# EAGLE board simpleservo3 (EAGLE 4.16)

Size 102.54 x 83.81 mm. Coordinates in mm from the lower left corner, seen from the top.
Outline: 0,0 102.54,0 102.54,83.81 0,83.81 0,0
Copper layers (1*16): Top 0.035mm / dielectric 1.5mm / Bottom 0.035mm
Design rules "default": minimum track width 10mil, minimum drill 24mil, track to track 8mil, track to pad 8mil, pad to pad 8mil, via to via 8mil, smd to smd 8mil, copper to edge 40mil, drill to drill 8mil, minimum pad ring 10mil, minimum via ring 8mil, stop-mask expansion 4mil, vias tented up to drill 0mil, thermal gap 10mil

## Footprints (pad centres in the part's own frame; a part is rotated, then mirrored left to right if it is on the bottom)
0204V = drill 0.813 octagon: 1 -1.27,0; 2 1.27,0
C025-025X050 = drill 0.813 octagon: 1 -1.27,0; 2 1.27,0
E5-13 = drill 1.016 pad 2.54 round: + -2.54,0 | drill 1.016 pad 2.54 octagon: - 2.54,0
E2,5-5 = drill 0.813 pad 1.6 round: + -1.27,0 | drill 0.813 pad 1.6 octagon: - 1.27,0
C025-030X050 = drill 0.813 octagon: 1 -1.27,0; 2 1.27,0
E2,5-6 = drill 0.813 pad 1.6 round: + -1.27,0 | drill 0.813 pad 1.6 octagon: - 1.27,0
DO41-10 = drill 1.118 round: A 5.08,0; C -5.08,0
MOLEX-RJ45 = drill 0.8 round: P$1 -3.81,2.54; P$2 -1.27,2.54; P$3 1.27,2.54; P$4 3.81,2.54; P$5 -2.54,0; P$6 0,0; P$7 2.54,0; P$8 5.08,0 | hole 3.2: -5.08,-6.985; 6.35,-6.985 | hole 1: -6.985,-3.175; 8.255,-3.175
LED3MM = drill 0.813 octagon: A -1.27,0; K 1.27,0
DIL14 = drill 0.813 long: 1 -7.62,-3.81; 2 -5.08,-3.81; 3 -2.54,-3.81; 4 0,-3.81; 5 2.54,-3.81; 6 5.08,-3.81; 7 7.62,-3.81; 8 7.62,3.81; 9 5.08,3.81; 10 2.54,3.81; 11 0,3.81; 12 -2.54,3.81; 13 -5.08,3.81; 14 -7.62,3.81
DIL20 = drill 0.813 long: 1 -11.43,-3.81; 2 -8.89,-3.81; 3 -6.35,-3.81; 4 -3.81,-3.81; 5 -1.27,-3.81; 6 1.27,-3.81; 7 3.81,-3.81; 8 6.35,-3.81; 9 8.89,-3.81; 10 11.43,-3.81; 11 11.43,3.81; 12 8.89,3.81; 13 6.35,3.81; 14 3.81,3.81; 15 1.27,3.81; 16 -1.27,3.81; 17 -3.81,3.81; 18 -6.35,3.81; 19 -8.89,3.81; 20 -11.43,3.81
22-23-2061 = drill 1 long: 1 -6.35,0; 2 -3.81,0; 3 -1.27,0; 4 1.27,0; 5 3.81,0; 6 6.35,0
1X08 = drill 1.016 long: 1 -8.89,0; 2 -6.35,0; 3 -3.81,0; 4 -1.27,0; 5 1.27,0; 6 3.81,0; 7 6.35,0; 8 8.89,0
1X04 = drill 1.016 long: 1 -3.81,0; 2 -1.27,0; 3 1.27,0; 4 3.81,0
1X02 = drill 1.016 long: 1 -1.27,0; 2 1.27,0
W237-132 = drill 1.194 long: 1 -2.54,-0.635; 2 2.54,-0.635
DIL06 = drill 0.813 long: 1 -2.54,-3.81; 2 0,-3.81; 3 2.54,-3.81; 4 2.54,3.81; 5 0,3.81; 6 -2.54,3.81
827001 = drill 1.5 pad 4 round: 1 -7.62,0; 2 -2.54,0; 3 2.54,0; 4 7.62,0 | hole 4: 5.08,-10.16; -5.08,-10.16 | hole 2.5: 10.16,-2.54; -10.16,-2.54
0204/5 = drill 0.813 octagon: 1 -2.54,0; 2 2.54,0
9077-1 = drill 0.813 long: 1 -2.54,-1.016; 2 0,-1.016; 3 2.54,-1.016
2X05 = drill 1.016 octagon: 1 -5.08,-1.27; 2 -5.08,1.27; 3 -2.54,-1.27; 4 -2.54,1.27; 5 0,-1.27; 6 0,1.27; 7 2.54,-1.27; 8 2.54,1.27; 9 5.08,-1.27; 10 5.08,1.27
TO-220-11 = drill 1.016 long: 1 -8.084,-2.718; 2 -6.382,2.337; 3 -4.68,-2.718; 4 -2.978,2.337; 5 -1.276,-2.718; 6 0.425,2.337; 7 2.127,-2.718; 8 3.829,2.337; 9 5.531,-2.718; 10 7.233,2.337; 11 8.934,-2.718
DIL40 = drill 0.813 long: 1 -24.13,-7.62; 2 -21.59,-7.62; 3 -19.05,-7.62; 4 -16.51,-7.62; 5 -13.97,-7.62; 6 -11.43,-7.62; 7 -8.89,-7.62; 8 -6.35,-7.62; 9 -3.81,-7.62; 10 -1.27,-7.62; 11 1.27,-7.62; 12 3.81,-7.62; 13 6.35,-7.62; 14 8.89,-7.62; 15 11.43,-7.62; 16 13.97,-7.62; 17 16.51,-7.62; 18 19.05,-7.62; 19 21.59,-7.62; 20 24.13,-7.62; 21 24.13,7.62; 22 21.59,7.62; 23 19.05,7.62; 24 16.51,7.62; 25 13.97,7.62; 26 11.43,7.62; 27 8.89,7.62; 28 6.35,7.62; 29 3.81,7.62; 30 1.27,7.62; 31 -1.27,7.62; 32 -3.81,7.62; 33 -6.35,7.62; 34 -8.89,7.62; 35 -11.43,7.62; 36 -13.97,7.62; 37 -16.51,7.62; 38 -19.05,7.62; 39 -21.59,7.62; 40 -24.13,7.62
HC49/S = drill 0.813 round: 1 -2.413,0; 2 2.413,0

## Placement (x,y rotation side)
10K  270  [0204V]  32.22,57.78 270 top
C1  0.01u  [C025-025X050]  88.1,50.16 180 top
C2  0.01u  [C025-025X050]  88.1,76.83 180 top
C4  470u  [E5-13]  34.76,75.56 270 top
C5  1u  [E2,5-5]  46.19,75.56 270 top
C8  .1u  [C025-030X050]  19.52,71.75 90 top
C9  10u  [E2,5-6]  19.52,78.1 270 top
C10  10u  [E2,5-6]  71.59,45.08 270 top
C11  10u  [E2,5-6]  8.09,3.17 90 top
C12  .1u  [C025-030X050]  32.22,38.73 270 top
C13  .1u  [C025-030X050]  66.51,45.08 270 top
C14  15pf  [C025-030X050]  20.79,34.92 180 top
C15  15pf  [C025-030X050]  20.79,40 180 top
C16  1u  [E2,5-6]  14.44,3.17 90 top
D1  1N4004  [DO41-10]  32.22,48.89 270 top
ENCODER/LIMIT  MOLEX-RJ4J  [MOLEX-RJ45]  86.83,14.6 0 top
FAULT-LED  [LED3MM]  5.55,55.24 0 top
IC1  74LS14N  [DIL14]  90.64,29.84 0 top
IC2  MAX233  [DIL20]  71.59,23.49 90 top
ICSP  [22-23-2061]  60.16,75.56 180 top
JP1  [1X08]  60.16,26.03 270 top
JP2  [1X08]  37.3,56.51 90 top
JP3  [1X08]  60.16,56.51 270 top
JP5  [1X04]  60.16,41.27 270 top
JP6  [1X04]  37.3,41.27 90 top
JP7  [1X02]  15.71,56.51 0 top
JP8  [1X08]  37.3,26.03 90 top
MTR  [W237-132]  96.99,45.08 90 top
OK1  4N35  [DIL06]  11.9,22.22 90 top
OK2  4N35  [DIL06]  11.9,45.08 90 top
OK3  4N35  [DIL06]  11.9,12.06 90 top
OK4  4N35  [DIL06]  11.9,33.65 90 top
PC  MOLEX-RJ4J  [MOLEX-RJ45]  25.87,14.6 0 top
PWR  [827001]  13.17,70.48 270 top
PWR-LED  [LED3MM]  27.14,62.86 90 top
R1  270  [0204V]  24.6,71.75 270 top
R2  270  [0204V]  10.63,53.97 90 top
R3  2.7k  [0204/5]  75.4,46.35 90 top
R5  10k  [0204V]  4.28,33.65 180 top
R6  10k  [0204V]  4.28,12.06 180 top
R7  10k  [0204V]  4.28,45.08 180 top
R8  10k  [0204V]  4.28,22.22 180 top
R9  330  [0204V]  11.9,38.73 0 top
R10  330  [0204V]  11.9,27.3 0 top
R11  330  [0204V]  11.9,17.14 0 top
R12  330  [0204V]  11.9,50.16 0 top
RESET  9077-1  [9077-1]  20.79,64.13 270 top
RS-232  [2X05]  51.27,8.25 180 top
U1  LMD18200T  [TO-220-11]  91.91,64.13 270 top
U$1  PIC18F4331  [DIL40]  48.73,41.27 270 top
XTAL  [HC49/S]  27.14,37.46 90 top

## Library data of the parts
10K C1 C2 C4 C5 C8-C16 R1-R3 R5-R12 = rcl
D1 = diode
ENCODER/LIMIT PC = con-rj45
FAULT-LED PWR-LED = led
IC1 = 74xx-us
IC2 = maxim
ICSP = con-molex
JP1-JP3 JP5-JP8 RS-232 = pinhead-1
MTR = con-wago-508
OK1-OK4 = optocoupler
PWR = con-amp
RESET = switch-misc
U1 = lmd1820x
U$1 = microchip-pic18fxx5x
XTAL = crystal

## Nets
+5V: JP7.1 PWR.4
+12V: C4.+ C5.+ C9.+ PWR.1 U1.6
BRAKE: JP3.8 U1.4 U$1.33
CHA: IC1.12 JP2.4 U$1.5
CHB: IC1.10 JP2.3 U$1.6
CSENSE: JP2.7 U$1.2
DIR: JP3.6 U1.3 U$1.35
GND: C1.2 C2.2 C4.- C5.- C8.2 C9.- C10.- C11.- C12.2 C13.2 C14.2 C15.2 C16.- ENCODER/LIMIT.P$7 ENCODER/LIMIT.P$8 IC1.7 IC2.6 IC2.9 ICSP.4 JP5.2 JP6.1 OK1.4 OK2.4 OK3.4 OK4.4 PWR.2 PWR.3 R1.1 R2.1 R3.1 R9.1 R10.1 R11.1 R12.1 RESET.2 RS-232.5 U1.7 U$1.12 U$1.31
IDX: IC1.8 JP2.5 U$1.4
LIMIT1: ENCODER/LIMIT.P$5 JP8.5 U$1.16
LIMIT2: ENCODER/LIMIT.P$6 JP8.4 U$1.17
MCLR: 10K.1 ICSP.6 JP2.8 RESET.3 U$1.1
N$1: IC2.12 IC2.17
N$2: C1.1 U1.11
N$3: MTR.2 U1.2
N$4: MTR.1 U1.10
N$5: C2.1 U1.1
N$6: OK3.2 R11.2
N$7: IC2.11 IC2.15
N$8: OK1.2 R10.2
N$9: OK4.2 R9.2
N$10: OK2.2 R12.2
N$11: 10K.2 D1.C
N$12: IC2.10 IC2.16
N$14: PWR-LED.K R1.2
N$16: RS-232.1 RS-232.4 RS-232.6
N$17: ENCODER/LIMIT.P$2 IC1.13
N$18: ENCODER/LIMIT.P$3 IC1.11
N$19: ENCODER/LIMIT.P$4 IC1.9
N$21: FAULT-LED.K R2.2
N$22: RS-232.7 RS-232.8
N$23: IC2.5 RS-232.2
N$24: IC2.4 RS-232.3
N$28: PC.P$5
N$29: PC.P$6
N$30: PC.P$7
N$31: PC.P$8
PC-DIR: OK3.1 PC.P$1
PC-ENABLE: OK4.1 PC.P$3
PC-FAULT: FAULT-LED.A OK2.5 PC.P$4 R7.1
PC-STEP: OK1.1 PC.P$2
PWM: JP3.7 R3.2 U1.5 U$1.34
RA1: JP2.6 U$1.3
RA5: JP2.2 U$1.7
RA6: C14.1 JP8.7 U$1.14 XTAL.1
RA7: C15.1 JP8.8 U$1.13 XTAL.2
RB3: JP3.5 U$1.36
RB4: JP3.4 U$1.37
RB5: ICSP.1 JP3.3 U$1.38
RB6: ICSP.2 JP3.2 U$1.39
RB7: ICSP.3 JP3.1 U$1.40
RC0: JP8.6 OK3.5 R6.1 U$1.15
RC3: JP8.3 OK1.5 R8.1 U$1.18
RC4: JP1.6 OK4.5 R5.1 U$1.23
RC5: JP1.5 OK2.1 U$1.24
RD0: JP8.2 U$1.19
RD1: JP8.1 U$1.20
RD2: JP1.8 U$1.21
RD3: JP1.7 U$1.22
RD5: JP1.1 U$1.28
RD6: JP5.4 U$1.29
RD7: JP5.3 U$1.30
RE0: JP2.1 U$1.8
RE1: JP6.4 U$1.9
RE2: JP6.3 U$1.10
RX: IC2.3 JP1.3 U$1.26
TFLAG: JP1.2 U1.9 U$1.27
TX: IC2.2 JP1.4 U$1.25
VCC: C8.1 C10.+ C11.+ C12.1 C13.1 C16.+ D1.A ENCODER/LIMIT.P$1 IC1.14 IC2.7 ICSP.5 JP5.1 JP6.2 JP7.2 PWR-LED.A R5.2 R6.2 R7.2 R8.2 U$1.11 U$1.32

## Tracks (layer width: path | path; a pad name or v marks a point on that pad's centre or on a via)
+5V  (1 unrouted)
+12V  (4 unrouted)
BRAKE  (2 unrouted)
CHA  (2 unrouted)
CHB  (2 unrouted)
CSENSE  (1 unrouted)
DIR  (2 unrouted)
GND  (38 unrouted)
IDX  (2 unrouted)
LIMIT1  (2 unrouted)
LIMIT2  (2 unrouted)
MCLR  (4 unrouted)
N$1  (1 unrouted)
N$2  (1 unrouted)
N$3  (1 unrouted)
N$4  (1 unrouted)
N$5  (1 unrouted)
N$6  (1 unrouted)
N$7  (1 unrouted)
N$8  (1 unrouted)
N$9  (1 unrouted)
N$10  (1 unrouted)
N$11  (1 unrouted)
N$12  (1 unrouted)
N$14  (1 unrouted)
N$16  (2 unrouted)
N$17  (1 unrouted)
N$18  (1 unrouted)
N$19  (1 unrouted)
N$21  (1 unrouted)
N$22  (1 unrouted)
N$23  (1 unrouted)
N$24  (1 unrouted)
PC-DIR  (1 unrouted)
PC-ENABLE  (1 unrouted)
PC-FAULT  (3 unrouted)
PC-STEP  (1 unrouted)
PWM  (3 unrouted)
RA1  (1 unrouted)
RA5  (1 unrouted)
RA6  (3 unrouted)
RA7  (3 unrouted)
RB3  (1 unrouted)
RB4  (1 unrouted)
RB5  (2 unrouted)
RB6  (2 unrouted)
RB7  (2 unrouted)
RC0  (3 unrouted)
RC3  (3 unrouted)
RC4  (3 unrouted)
RC5  (2 unrouted)
RD0  (1 unrouted)
RD1  (1 unrouted)
RD2  (1 unrouted)
RD3  (1 unrouted)
RD5  (1 unrouted)
RD6  (1 unrouted)
RD7  (1 unrouted)
RE0  (1 unrouted)
RE1  (1 unrouted)
RE2  (1 unrouted)
RX  (2 unrouted)
TFLAG  (2 unrouted)
TX  (2 unrouted)
VCC  (20 unrouted)